# EAGLE board CT_schematic (EAGLE 7.6.0)

Size 100 x 80 mm. Coordinates in mm from the lower left corner, seen from the top.
Outline: 0,0 100,0 100,80 0,80 0,0
Copper layers (1*16): Top 0.035mm / dielectric 1.5mm / Bottom 0.035mm
Design rules "default": minimum track width 10mil, minimum drill 24mil, track to track 8mil, track to pad 8mil, pad to pad 8mil, via to via 8mil, smd to smd 8mil, copper to edge 40mil, drill to drill 8mil, minimum pad ring 10mil, minimum via ring 8mil, stop-mask expansion 4mil, vias tented up to drill 0mil, thermal gap 10mil

## Footprints (pad centres in the part's own frame; a part is rotated, then mirrored left to right if it is on the bottom)
C0603 = smd 0.8 x 0.8: 1 -0.762,0; 2 0.762,0
C0402 = smd 0.5 x 0.5: 1 -0.508,0; 2 0.508,0
C0805 = smd 1.2 x 1.3: 1 -1.016,0; 2 1.016,0
C1210 = smd 1.2 x 2.5: 1 -1.524,0; 2 1.524,0
R0603 = smd 0.8 x 0.8: 1 -0.762,0; 2 0.762,0
EXV-9H = smd 3.505 x 1.676: 1 -2.857,0; 2 2.857,0
L0603 = smd 0.8 x 0.8: 1 -0.762,0; 2 0.762,0
L1210 = smd 1.2 x 2.5: 1 -1.524,0; 2 1.524,0
PJ-037B_PACKAGE = drill 3.7 square: 1 12,0 | drill 3.2 square: 2 6,0
TFBGA216 = smd 0.4 x 0.4: A1 -5.6,5.6; A2 -4.8,5.6; A3 -4,5.6; A4 -3.2,5.6; A5 -2.4,5.6; A6 -1.6,5.6; A7 -0.8,5.6; A8 0,5.6; A9 0.8,5.6; A10 1.6,5.6; A11 2.4,5.6; A12 3.2,5.6; A13 4,5.6; A14 4.8,5.6; A15 5.6,5.6; B1 -5.6,4.8; B2 -4.8,4.8; B3 -4,4.8; B4 -3.2,4.8; B5 -2.4,4.8; B6 -1.6,4.8; B7 -0.8,4.8; B8 0,4.8; B9 0.8,4.8; B10 1.6,4.8; B11 2.4,4.8; B12 3.2,4.8; B13 4,4.8; B14 4.8,4.8; B15 5.6,4.8; C1 -5.6,4; C2 -4.8,4; C3 -4,4; C4 -3.2,4; C5 -2.4,4; C6 -1.6,4; C7 -0.8,4; C8 0,4; C9 0.8,4; C10 1.6,4; C11 2.4,4; C12 3.2,4; C13 4,4; C14 4.8,4; C15 5.6,4; D1 -5.6,3.2; D2 -4.8,3.2; D3 -4,3.2; D4 -3.2,3.2; D5 -2.4,3.2; D6 -1.6,3.2; D7 -0.8,3.2; D8 0,3.2; D9 0.8,3.2; D10 1.6,3.2; D11 2.4,3.2; D12 3.2,3.2; D13 4,3.2; D14 4.8,3.2; D15 5.6,3.2; E1 -5.6,2.4; E2 -4.8,2.4; E3 -4,2.4; E4 -3.2,2.4; E5 -2.4,2.4; E6 -1.6,2.4; E7 -0.8,2.4; E8 0,2.4; E9 0.8,2.4; E10 1.6,2.4; E11 2.4,2.4; E12 3.2,2.4; E13 4,2.4; E14 4.8,2.4; E15 5.6,2.4; F1 -5.6,1.6; F2 -4.8,1.6; F3 -4,1.6; F4 -3.2,1.6; F5 -2.4,1.6; F6 -1.6,1.6; F7 -0.8,1.6; F8 0,1.6; F9 0.8,1.6; F10 1.6,1.6; F11 2.4,1.6; F12 3.2,1.6; F13 4,1.6; F14 4.8,1.6; F15 5.6,1.6; G1 -5.6,0.8; G2 -4.8,0.8; G3 -4,0.8; G4 -3.2,0.8; G5 -2.4,0.8; G6 -1.6,0.8; G10 1.6,0.8; G11 2.4,0.8; G12 3.2,0.8; G13 4,0.8; G14 4.8,0.8; G15 5.6,0.8; H1 -5.6,0; H2 -4.8,0; H3 -4,0; H4 -3.2,0; H5 -2.4,0; H6 -1.6,0; H10 1.6,0; H11 2.4,0; H12 3.2,0; H13 4,0; H14 4.8,0; H15 5.6,0; J1 -5.6,-0.8; J2 -4.8,-0.8; J3 -4,-0.8; J4 -3.2,-0.8; J5 -2.4,-0.8; J6 -1.6,-0.8; J10 1.6,-0.8; J11 2.4,-0.8; J12 3.2,-0.8; J13 4,-0.8; J14 4.8,-0.8; J15 5.6,-0.8; K1 -5.6,-1.6; K2 -4.8,-1.6; K3 -4,-1.6; K4 -3.2,-1.6; K5 -2.4,-1.6; K6 -1.6,-1.6; K7 -0.8,-1.6; K8 0,-1.6; K9 0.8,-1.6; K10 1.6,-1.6; K11 2.4,-1.6; K12 3.2,-1.6; K13 4,-1.6; K14 4.8,-1.6; K15 5.6,-1.6; L1 -5.6,-2.4; L2 -4.8,-2.4; L3 -4,-2.4; L4 -3.2,-2.4; L5 -2.4,-2.4; L6 -1.6,-2.4; L7 -0.8,-2.4; L8 0,-2.4; L9 0.8,-2.4; L10 1.6,-2.4; L11 2.4,-2.4; L12 3.2,-2.4; L13 4,-2.4; L14 4.8,-2.4; L15 5.6,-2.4; M1 -5.6,-3.2; M2 -4.8,-3.2; M3 -4,-3.2; M4 -3.2,-3.2; M5 -2.4,-3.2; M6 -1.6,-3.2; M7 -0.8,-3.2; M8 0,-3.2; M9 0.8,-3.2; M10 1.6,-3.2; M11 2.4,-3.2; M12 3.2,-3.2; M13 4,-3.2; M14 4.8,-3.2; M15 5.6,-3.2; N1 -5.6,-4; N2 -4.8,-4; N3 -4,-4; N4 -3.2,-4; N5 -2.4,-4; N6 -1.6,-4; N7 -0.8,-4; N8 0,-4; N9 0.8,-4; N10 1.6,-4; N11 2.4,-4; N12 3.2,-4; N13 4,-4; N14 4.8,-4; N15 5.6,-4; P1 -5.6,-4.8; P2 -4.8,-4.8; P3 -4,-4.8; P4 -3.2,-4.8; P5 -2.4,-4.8; P6 -1.6,-4.8; P7 -0.8,-4.8; P8 0,-4.8; P9 0.8,-4.8; P10 1.6,-4.8; P11 2.4,-4.8; P12 3.2,-4.8; P13 4,-4.8; P14 4.8,-4.8; P15 5.6,-4.8; R1 -5.6,-5.6; R2 -4.8,-5.6; R3 -4,-5.6; R4 -3.2,-5.6; R5 -2.4,-5.6; R6 -1.6,-5.6; R7 -0.8,-5.6; R8 0,-5.6; R9 0.8,-5.6; R10 1.6,-5.6; R11 2.4,-5.6; R12 3.2,-5.6; R13 4,-5.6; R14 4.8,-5.6; R15 5.6,-5.6
SOT-23-6 = smd 1.1 x 0.6: 1 -1.4,0.95; 2 -1.4,0; 3 -1.4,-0.95; 4 1.4,-0.95; 5 1.4,0; 6 1.4,0.95
A2500R24A00GM = smd 1.5 x 0.61: 1 -3,7; 2 -3,6; 3 -3,5; 4 -3,4; 5 -3,3; 6 -3,2; 7 -3,1; 8 -3,0; 17 5.22,0; 18 5.22,1; 19 5.22,2; 20 5.22,3; 21 5.22,4; 22 5.22,5; 23 5.22,6; 24 5.22,7 | smd 0.61 x 1.5: 9 -2.39,-1.6; 10 -1.39,-1.6; 11 -0.39,-1.6; 12 0.61,-1.6; 13 1.61,-1.6; 14 2.61,-1.6; 15 3.61,-1.6; 16 4.61,-1.6 | smd 1 x 1: 25 -2.8,9; 26 -2.8,13; 27 5.02,9; 28 5.02,13; 29 0.11,5.75; 30 2.11,5.75
SAMTEC_FTSH-105-01-L-DV-K = smd 0.762 x 2.794: 1 -2.54,-2.032; 2 -2.54,2.032; 3 -1.27,-2.032; 4 -1.27,2.032; 5 0,-2.032; 6 0,2.032; 7 1.27,-2.032; 8 1.27,2.032; 9 2.54,-2.032; 10 2.54,2.032
LH430WV2-SD01 = smd 0.23 x 0.7: 1 0,0; 2 -0.4,0; 3 -0.8,0; 4 -1.2,0; 5 -1.6,0; 6 -2,0; 7 -2.4,0; 8 -2.8,0; 9 -3.2,0; 10 -3.6,0; 11 -4,0; 12 -4.4,0; 13 -4.8,0; 14 -5.2,0; 15 -5.6,0; 16 -5.6,-2.15; 17 -5.2,-2.15; 18 -4.8,-2.15; 19 -4.4,-2.15; 20 -4,-2.15; 21 -3.6,-2.15; 22 -3.2,-2.15; 23 -2.8,-2.15; 24 -2.4,-2.15; 25 -2,-2.15; 26 -1.6,-2.15; 27 -1.2,-2.15; 28 -0.8,-2.15; 29 -0.4,-2.15; 30 0,-2.15
SOIC-8 = smd 1.6 x 0.6: 1 -2.7,1.905 | smd 1.55 x 0.6: 2 -2.7,0.635; 3 -2.7,-0.635; 4 -2.7,-1.905; 5 2.7,-1.905; 6 2.7,-0.635; 7 2.7,0.635; 8 2.7,1.905
182-009-MALE = drill 1.194 pad 1.524 octagon: 1 -5.537,10.923; 2 -2.769,10.923; 3 0,10.923; 4 2.769,10.923; 5 5.537,10.923; 6 -4.153,8.08; 7 -1.384,8.08; 8 1.384,8.08; 9 4.153,8.08 | hole 3.048: -12.446,9.501; 12.446,9.501
RHB32_3P45X3P45 = smd 0.85 x 0.28: 1 -2.475,1.75; 2 -2.475,1.25; 3 -2.475,0.75; 4 -2.475,0.25; 5 -2.475,-0.25; 6 -2.475,-0.75; 7 -2.475,-1.25; 8 -2.475,-1.75; 17 2.475,-1.75; 18 2.475,-1.25; 19 2.475,-0.75; 20 2.475,-0.25; 21 2.475,0.25; 22 2.475,0.75; 23 2.475,1.25; 24 2.475,1.75 | smd 0.28 x 0.85: 9 -1.75,-2.475; 10 -1.25,-2.475; 11 -0.75,-2.475; 12 -0.25,-2.475; 13 0.25,-2.475; 14 0.75,-2.475; 15 1.25,-2.475; 16 1.75,-2.475; 25 1.75,2.475; 26 1.25,2.475; 27 0.75,2.475; 28 0.25,2.475; 29 -0.25,2.475; 30 -0.75,2.475; 31 -1.25,2.475; 32 -1.75,2.475 | smd 3.45 x 3.45: 33 0,0
FCI_10118193-0001LF = smd 0.4 x 1.35: 1 -1.3,2.675; 2 -0.65,2.675; 3 0,2.675; 4 0.65,2.675; 5 1.3,2.675 | smd 1.6 x 1.4: 6 -3.2,2.45; 7 3.2,2.45 | smd 1.9 x 1.9: 8 -1.2,0; 9 1.2,0 | hole 0.5: -3.3,0; 3.3,0
SOT143B = smd 1 x 0.7: 1 -0.75,-1 | smd 0.6 x 0.7: 2 0.95,-1; 3 0.95,1; 4 -0.95,1
MICRO_USB_AB = smd 0.4 x 1.35: 1 1.3,0.26; 2 0.65,0.26; 3 0,0.26; 4 -0.65,0.26; 5 -1.3,0.26 | drill 0.6 pad 0.95 long: 6 4.175,-2.54; 7 -4.175,-2.54 | drill 0.7 pad 1.1 long: 8 -2.225,0.46; 9 2.225,0.46
ABS07-32.768KHZ-7-T = smd 1.1 x 2.4: 1 -2.5,0; 2 0,0
ABLS-25.000MHZ-B2F-T = smd 5.6 x 2.8: 1 -3.81,0; 2 5.69,0
ASFL1 = smd 1.7 x 1.5: 1 -1.27,-1.1; 2 1.27,-1.1; 3 1.27,1.1; 4 -1.27,1.1
WSON-8 = smd 0.3 x 0.6: 1 -0.75,0; 2 0.05,0; 3 0.85,0; 4 1.65,0; 5 1.65,3.8; 6 0.85,3.8; 7 0.05,3.8; 8 -0.75,3.8 | smd 3 x 2.6: PAD 0.45,1.9
SOIC-8_EP = smd 1.6 x 0.533: 1 -2.921,1.905; 2 -2.921,0.635; 3 -2.921,-0.635; 4 -2.921,-1.905; 5 2.921,-1.905; 6 2.921,-0.635; 7 2.921,0.635; 8 2.921,1.905 | smd 2.54 x 3.302: EPAD 0,0 | drill 0.406 pad 0.406: P$1 -0.508,0.635; P$2 0.381,0.635; P$3 -0.508,-0.635; P$4 0.381,-0.635
DFN-8_DDB = smd 0.805 x 0.3: 1 -0.952,0.75; 2 -0.952,0.25; 3 -0.952,-0.25; 4 -0.952,-0.75; 5 0.952,-0.75; 6 0.952,-0.25; 7 0.952,0.25; 8 0.952,0.75 | smd 0.61 x 2.2: 9 0,0
QFN-38_UHF = smd 0.75 x 0.3: 1 -2.4,2.75; 2 -2.4,2.25; 3 -2.4,1.75; 4 -2.4,1.25; 6 -2.4,0.25; 7 -2.4,-0.25; 8 -2.4,-0.75; 9 -2.4,-1.25; 10 -2.4,-1.75; 11 -2.4,-2.25; 12 -2.4,-2.75; 20 2.4,-2.75; 21 2.4,-2.25; 22 2.4,-1.75; 23 2.4,-1.25; 24 2.4,-0.75; 25 2.4,-0.25; 26 2.4,0.25; 27 2.4,0.75; 28 2.4,1.25; 29 2.4,1.75; 30 2.4,2.25; 31 2.4,2.75 | smd 0.758 x 0.3: 5 -2.4,0.75 | smd 0.3 x 0.75: 13 -1.5,-3.4; 14 -1,-3.4; 15 -0.5,-3.4; 16 0,-3.4; 17 0.5,-3.4; 18 1,-3.4; 19 1.5,-3.4; 32 1.5,3.4; 33 1,3.4; 34 0.5,3.4; 35 0,3.4; 36 -0.5,3.4; 37 -1,3.4; 38 -1.5,3.4 | smd 3.2 x 5.2: 39 0,0
IRF8306MTRPBF = smd 0.9 x 1.85: 1 0,0; 2 0,-2.35; 6 6.4,0; 7 6.4,-2.35 | smd 0.75 x 0.75: 3 1.75,-1.175 | smd 1.45 x 0.87: 4 3.5,-0.565; 5 3.5,-1.785
DCU0008A_N = smd 0.5 x 0.3: 1 -1.6,0.75; 2 -1.6,0.25; 3 -1.6,-0.25; 4 -1.6,-0.75; 5 1.6,-0.75; 6 1.6,-0.25; 7 1.6,0.25; 8 1.6,0.75
SW_4-1437565-2 = smd 1.4 x 2.1: 1 -2.23,4.55; 2 -2.23,-4.55; 3 2.23,4.55; 4 2.23,-4.55
LGM67K-G1J2-24-Z = smd 0.8 x 1.4: A -2,0; C 0,0
NC7SZ125M5X = smd 1.3 x 0.7: 1 -1.3,0.95; 2 -1.3,0; 3 -1.3,-0.95; 4 1.3,-0.95; 5 1.3,0.95

## Placement (x,y rotation side)
C1  1e-06  [C0603]  -30.48,92.71 0 top  (outside the outline)
C2  1e-07  [C0603]  -34.29,92.71 0 top  (outside the outline)
C3  1e-07  [C0603]  -38.1,92.71 0 top  (outside the outline)
C4  1e-07  [C0603]  -41.91,92.71 0 top  (outside the outline)
C5  1e-07  [C0603]  -45.72,92.71 0 top  (outside the outline)
C6  1e-07  [C0603]  -49.53,92.71 0 top  (outside the outline)
C7  1e-07  [C0603]  -53.34,92.71 0 top  (outside the outline)
C8  1e-07  [C0603]  -57.15,92.71 0 top  (outside the outline)
C9  1e-07  [C0603]  -60.96,92.71 0 top  (outside the outline)
C10  1e-07  [C0603]  -64.77,92.71 0 top  (outside the outline)
C11  1e-07  [C0603]  -68.58,92.71 0 top  (outside the outline)
C12  1e-07  [C0603]  -72.39,92.71 0 top  (outside the outline)
C13  1e-07  [C0603]  -76.2,92.71 0 top  (outside the outline)
C14  1e-07  [C0603]  -80.01,92.71 0 top  (outside the outline)
C15  1e-07  [C0603]  -83.82,92.71 0 top  (outside the outline)
C16  1e-07  [C0603]  -87.63,92.71 0 top  (outside the outline)
C17  1e-07  [C0603]  -91.44,92.71 0 top  (outside the outline)
C18  1e-07  [C0603]  -95.25,92.71 0 top  (outside the outline)
C19  1e-07  [C0603]  -99.06,92.71 0 top  (outside the outline)
C20  1e-07  [C0603]  -102.87,92.71 0 top  (outside the outline)
C21  1e-07  [C0603]  -15.24,97.79 0 top  (outside the outline)
C22  4.7e-06  [C0603]  -95.25,87.63 0 top  (outside the outline)
C23  1e-08  [C0603]  -19.05,97.79 0 top  (outside the outline)
C24  1e-06  [C0603]  -22.86,97.79 0 top  (outside the outline)
C25  1e-07  [C0603]  -26.67,97.79 0 top  (outside the outline)
C26  2.2e-06  [C0603]  -99.06,87.63 0 top  (outside the outline)
C27  1e-07  [C0603]  -30.48,97.79 0 top  (outside the outline)
C28  1e-07  [C0603]  -34.29,97.79 0 top  (outside the outline)
C29  1e-11  [C0402]  -39.37,102.87 0 top  (outside the outline)
C30  1e-11  [C0402]  -43.18,102.87 0 top  (outside the outline)
C31  1e-11  [C0402]  -46.99,102.87 0 top  (outside the outline)
C32  1e-11  [C0402]  -50.8,102.87 0 top  (outside the outline)
C33  1e-05  [C0805]  -58.42,77.47 0 top  (outside the outline)
C34  1e-07  [C0402]  -54.61,102.87 0 top  (outside the outline)
C35  1e-07  [C0402]  -58.42,102.87 0 top  (outside the outline)
C36  1e-07  [C0402]  -62.23,102.87 0 top  (outside the outline)
C37  1e-07  [C0402]  -66.04,102.87 0 top  (outside the outline)
C38  1e-07  [C0402]  -69.85,102.87 0 top  (outside the outline)
C39  1e-07  [C0402]  -73.66,102.87 0 top  (outside the outline)
C40  1e-07  [C0402]  -77.47,102.87 0 top  (outside the outline)
C41  1e-07  [C0402]  -81.28,102.87 0 top  (outside the outline)
C42  2.2e-06  [C0603]  -102.87,87.63 0 top  (outside the outline)
C43  1e-07  [C0402]  -85.09,102.87 0 top  (outside the outline)
C44  1e-07  [C0402]  -88.9,102.87 0 top  (outside the outline)
C45  2.2e-06  [C0603]  -15.24,92.71 0 top  (outside the outline)
C46  1e-06  [C0603]  -38.1,97.79 0 top  (outside the outline)
C47  1e-08  [C0402]  -92.71,102.87 0 top  (outside the outline)
C48  1e-08  [C0402]  -96.52,102.87 0 top  (outside the outline)
C49  1e-05  [C1210]  -29.21,71.12 0 top  (outside the outline)
C50  1e-05  [C0805]  -63.5,77.47 0 top  (outside the outline)
C51  1e-05  [C1210]  -35.56,71.12 0 top  (outside the outline)
C52  1e-05  [C1210]  -41.91,71.12 0 top  (outside the outline)
C53  1e-05  [C1210]  -48.26,71.12 0 top  (outside the outline)
C54  1e-05  [C1210]  -54.61,71.12 0 top  (outside the outline)
C55  1e-08  [C0402]  -100.33,102.87 0 top  (outside the outline)
C56  1e-05  [C1210]  -60.96,71.12 0 top  (outside the outline)
C57  1e-05  [C0805]  -68.58,77.47 0 top  (outside the outline)
C58  1e-08  [C0402]  -104.14,102.87 0 top  (outside the outline)
C59  1e-05  [C1210]  -67.31,71.12 0 top  (outside the outline)
C60  1e-05  [C1210]  -73.66,71.12 0 top  (outside the outline)
C61  8e-07  [R0603]  -41.91,97.79 0 top  (outside the outline)
C62  1e-05  [C1210]  -80.01,71.12 0 top  (outside the outline)
C63  1e-08  [C0402]  -15.24,107.95 0 top  (outside the outline)
C64  1e-05  [C1210]  -86.36,71.12 0 top  (outside the outline)
C65  1e-05  [C1210]  -92.71,71.12 0 top  (outside the outline)
C66  1e-05  [C1210]  -99.06,71.12 0 top  (outside the outline)
C67  2.2e-06  [C0603]  -19.05,92.71 0 top  (outside the outline)
C68  2.2e-07  [C0603]  -22.86,92.71 0 top  (outside the outline)
C69  1e-08  [C0402]  -19.05,107.95 0 top  (outside the outline)
C70  1e-05  [C1210]  -16.51,77.47 0 top  (outside the outline)
C71  1e-05  [C0805]  -73.66,77.47 0 top  (outside the outline)
C72  1e-07  [C0402]  -22.86,107.95 0 top  (outside the outline)
C73  2.2e-06  [C0603]  -26.67,92.71 0 top  (outside the outline)
C74  2.45e-08  [R0603]  -72.39,82.55 0 top  (outside the outline)
C75  2.8258362168397e-09  [R0603]  -83.82,77.47 0 top  (outside the outline)
C76  7.105e-09  [R0603]  -16.51,82.55 0 top  (outside the outline)
C77  0.0001  [EXV-9H]  -26.67,63.5 0 top  (outside the outline)
C78  0.0001  [EXV-9H]  -38.1,63.5 0 top  (outside the outline)
C79  1e-08  [C0402]  -26.67,107.95 0 top  (outside the outline)
C80  1e-07  [C0402]  -30.48,107.95 0 top  (outside the outline)
C81  1e-08  [C0402]  -34.29,107.95 0 top  (outside the outline)
C82  1e-07  [C0402]  -38.1,107.95 0 top  (outside the outline)
C83  1e-08  [C0402]  -41.91,107.95 0 top  (outside the outline)
C84  1e-08  [C0402]  -45.72,107.95 0 top  (outside the outline)
C85  1e-08  [C0402]  -49.53,107.95 0 top  (outside the outline)
C86  1e-08  [C0402]  -53.34,107.95 0 top  (outside the outline)
F1  240.0  [L0603]  -45.72,97.79 0 top  (outside the outline)
I1  1e-05  [L1210]  -22.86,77.47 0 top  (outside the outline)
J1  PJ-037B  [PJ-037B_PACKAGE]  -57.15,33.02 0 top  (outside the outline)
R2  1000.0  [R0603]  -49.53,97.79 0 top  (outside the outline)
R7  4700.0  [R0603]  -53.34,97.79 0 top  (outside the outline)
R8  4700.0  [R0603]  -57.15,97.79 0 top  (outside the outline)
R9  4700.0  [R0603]  -60.96,97.79 0 top  (outside the outline)
R10  2200.0  [R0603]  -64.77,97.79 0 top  (outside the outline)
R11  47000.0  [R0603]  -77.47,82.55 0 top  (outside the outline)
R12  10000.0  [R0603]  -82.55,82.55 0 top  (outside the outline)
R13  10000.0  [R0603]  -87.63,82.55 0 top  (outside the outline)
R14  10000.0  [R0603]  -92.71,82.55 0 top  (outside the outline)
R15  10000.0  [R0603]  -97.79,82.55 0 top  (outside the outline)
R16  10000.0  [R0603]  -102.87,82.55 0 top  (outside the outline)
R17  10000.0  [R0603]  -15.24,87.63 0 top  (outside the outline)
R18  10000.0  [R0603]  -20.32,87.63 0 top  (outside the outline)
R19  10000.0  [R0603]  -25.4,87.63 0 top  (outside the outline)
R20  10000.0  [R0603]  -30.48,87.63 0 top  (outside the outline)
R21  5.0  [R0603]  -68.58,97.79 0 top  (outside the outline)
R22  10000.0  [R0603]  -35.56,87.63 0 top  (outside the outline)
R23  120.0  [R0603]  -72.39,97.79 0 top  (outside the outline)
R24  100000.0  [R0603]  -21.59,82.55 0 top  (outside the outline)
R25  10000.0  [R0603]  -40.64,87.63 0 top  (outside the outline)
R26  10000.0  [R0603]  -45.72,87.63 0 top  (outside the outline)
R27  100000.0  [R0603]  -26.67,82.55 0 top  (outside the outline)
R28  200.0  [R0603]  -76.2,97.79 0 top  (outside the outline)
R29  1000.0  [R0603]  -80.01,97.79 0 top  (outside the outline)
R30  910.0  [R0603]  -83.82,97.79 0 top  (outside the outline)
R31  2200.0  [R0603]  -87.63,97.79 0 top  (outside the outline)
R32  100000.0  [R0603]  -31.75,82.55 0 top  (outside the outline)
R33  806.0  [R0603]  -91.44,97.79 0 top  (outside the outline)
R34  1000.0  [R0603]  -95.25,97.79 0 top  (outside the outline)
R35  100000.0  [R0603]  -36.83,82.55 0 top  (outside the outline)
R36  1800.0  [R0603]  -99.06,97.79 0 top  (outside the outline)
R37  1000.0  [R0603]  -102.87,97.79 0 top  (outside the outline)
R38  100000.0  [R0603]  -41.91,82.55 0 top  (outside the outline)
R39  153694.38  [R0603]  -96.52,77.47 0 top  (outside the outline)
R40  100000.0  [R0603]  -46.99,82.55 0 top  (outside the outline)
R41  100000.0  [R0603]  -52.07,82.55 0 top  (outside the outline)
R42  3900.0  [R0603]  -15.24,102.87 0 top  (outside the outline)
R43  1000.0  [R0603]  -19.05,102.87 0 top  (outside the outline)
R44  100000.0  [R0603]  -57.15,82.55 0 top  (outside the outline)
R45  1600000.0  [R0603]  -101.6,77.47 0 top  (outside the outline)
R46  100000.0  [R0603]  -62.23,82.55 0 top  (outside the outline)
R47  200.0  [R0603]  -22.86,102.87 0 top  (outside the outline)
R48  1000.0  [R0603]  -26.67,102.87 0 top  (outside the outline)
R49  10000.0  [R0603]  -50.8,87.63 0 top  (outside the outline)
R50  75000.0  [R0603]  -55.88,87.63 0 top  (outside the outline)
R51  10000.0  [R0603]  -60.96,87.63 0 top  (outside the outline)
R52  10000.0  [R0603]  -66.04,87.63 0 top  (outside the outline)
R53  95300.0  [R0603]  -71.12,87.63 0 top  (outside the outline)
R54  95300.0  [R0603]  -76.2,87.63 0 top  (outside the outline)
R55  10000.0  [R0603]  -81.28,87.63 0 top  (outside the outline)
R56  10000.0  [R0603]  -86.36,87.63 0 top  (outside the outline)
R57  10000.0  [R0603]  -91.44,87.63 0 top  (outside the outline)
R58  102454.54545455  [R0603]  -91.44,77.47 0 top  (outside the outline)
R59  200000.0  [R0603]  -67.31,82.55 0 top  (outside the outline)
U1  STM32F469NGH6  [TFBGA216]  -85.09,8.89 0 top  (outside the outline)
U2  MAX4995AAUT+T  [SOT-23-6]  -27.94,76.2 0 top  (outside the outline)
U3  A2500R24A00GM  [A2500R24A00GM]  -27.94,7.62 0 top  (outside the outline)
U4  FTSH-105-01-L-DV-K  [SAMTEC_FTSH-105-01-L-DV-K]  -35.56,33.02 0 top  (outside the outline)
U5  LH430WV2-SD01  [LH430WV2-SD01]  -30.48,104.14 0 top  (outside the outline)
U6  SN65HVD230D  [SOIC-8]  -100.33,30.48 0 top  (outside the outline)
U7  182-009-113R531  [182-009-MALE]  -57.15,6.35 0 top  (outside the outline)
U8  TUSB1210BRHBR  [RHB32_3P45X3P45]  -68.58,63.5 0 top  (outside the outline)
U9  10118193-0001LF  [FCI_10118193-0001LF]  -93.98,53.34 0 top  (outside the outline)
U10  prtr5v0u2ax  [SOT143B]  -72.39,107.95 0 top  (outside the outline)
U11  47590-0001  [MICRO_USB_AB]  -66.04,33.02 0 top  (outside the outline)
U12  prtr5v0u2ax  [SOT143B]  -85.09,107.95 0 top  (outside the outline)
U13  ABS07-32.768KHZ-7-T  [ABS07-32.768KHZ-7-T]  -88.9,63.5 0 top  (outside the outline)
U14  ABLS-25.000MHZ-B2F-T  [ABLS-25.000MHZ-B2F-T]  -57.15,63.5 0 top  (outside the outline)
U15  ASFL1-26MHZ-NCS  [ASFL1]  -85.09,54.61 0 top  (outside the outline)
U16  LP3878SDX-ADJ/NOPB  [WSON-8]  -60.96,43.18 0 top  (outside the outline)
U17  MIC5234YME  [SOIC-8_EP]  -97.79,62.23 0 top  (outside the outline)
U18  LP3878SDX-ADJ/NOPB  [WSON-8]  -81.28,43.18 0 top  (outside the outline)
U19  LP3878SDX-ADJ/NOPB  [WSON-8]  -101.6,43.18 0 top  (outside the outline)
U20  LP2951ACSDX/NOPB  [WSON-8]  -68.58,52.07 0 top  (outside the outline)
U21  LP3878SDX-ADJ/NOPB  [WSON-8]  -30.48,52.07 0 top  (outside the outline)
U22  LT3494AEDDB#TRMPBF  [DFN-8_DDB]  -57.15,107.95 0 top  (outside the outline)
U23  LP3878SDX-ADJ/NOPB  [WSON-8]  -50.8,52.07 0 top  (outside the outline)
U24  LTC2928CUHF#PBF  [QFN-38_UHF]  -16.51,63.5 0 top  (outside the outline)
U25  IRF8306MTRPbF  [IRF8306MTRPBF]  -26.67,45.72 0 top  (outside the outline)
U26  IRF8306MTRPbF  [IRF8306MTRPBF]  -41.91,45.72 0 top  (outside the outline)
U27  LSF0102DCTR  [DCU0008A_N]  -97.79,107.95 0 top  (outside the outline)
U28  4-1437565-2  [SW_4-1437565-2]  -86.36,31.75 0 top  (outside the outline)
U29  Q65110A2395  [LGM67K-G1J2-24-Z]  -17.78,71.12 0 top  (outside the outline)
U30  nc7sz125m5x  [NC7SZ125M5X]  -33.02,76.2 0 top  (outside the outline)
U31  nc7sz125m5x  [NC7SZ125M5X]  -39.37,76.2 0 top  (outside the outline)
U32  nc7sz125m5x  [NC7SZ125M5X]  -45.72,76.2 0 top  (outside the outline)
U33  nc7sz125m5x  [NC7SZ125M5X]  -52.07,76.2 0 top  (outside the outline)

## Library data of the parts
C1-C86 F1 I1 J1 R2 R7-R59 U1-U33 = circuit_tree

## Nets
CLK_CRYSTAL_U1_E1: C29.1 U1.E1 U13.1
CLK_CRYSTAL_U1_F1: C30.1 U1.F1 U13.2
CLK_CRYSTAL_U1_G1: C31.1 U1.G1 U14.1
CLK_CRYSTAL_U1_H1: C32.1 U1.H1 U14.2
CLK_U8_1: U8.1 U15.3
GND: C1.2 C2.2 C3.2 C4.2 C5.2 C6.2 C7.2 C8.2 C9.2 C10.2 C11.2 C12.2 C13.2 C14.2 C15.2 C16.2 C17.2 C18.2 C19.2 C20.2 C21.2 C22.2 C23.2 C24.2 C25.2 C26.2 C27.2 C28.2 C29.2 C30.2 C31.2 C32.2 C33.2 C34.2 C35.2 C36.2 C37.2 C38.2 C39.2 C40.2 C41.2 C42.2 C43.2 C44.2 C45.2 C46.2 C47.2 C48.2 C49.2 C50.2 C51.2 C52.2 C53.2 C54.2 C55.2 C56.2 C57.2 C58.2 C59.2 C60.2 C61.2 C62.2 C63.2 C64.2 C65.2 C66.2 C67.2 C68.2 C69.2 C70.2 C71.2 C72.2 C73.2 C74.2 C75.2 C76.2 C77.2 C78.2 C79.2 C80.2 C81.2 C82.2 C83.2 C84.2 C85.2 C86.2 J1.2 R2.2 R11.2 R14.2 R17.2 R21.2 R22.2 R24.2 R29.2 R31.2 R34.2 R37.2 R40.2 R43.2 R48.2 R50.2 R53.2 R54.2 R55.2 R56.2 R57.2 U1.F2 U1.F6 U1.F7 U1.F8 U1.F9 U1.F10 U1.G6 U1.G10 U1.G12 U1.H6 U1.H10 U1.J6 U1.J10 U1.K6 U1.K7 U1.K8 U1.K9 U1.K10 U1.L6 U1.M1 U1.N1 U2.2 U3.8 U3.17 U4.3 U4.5 U5.1 U5.6 U5.9 U5.12 U5.15 U5.17 U5.18 U5.19 U5.24 U5.27 U6.2 U7.5 U8.33 U9.5 U9.6 U9.7 U9.8 U9.9 U10.1 U11.5 U11.6 U11.7 U11.8 U11.9 U12.1 U15.2 U16.3 U16.PAD U17.7 U17.EPAD U18.3 U18.PAD U19.3 U19.PAD U20.3 U20.4 U20.PAD U21.3 U21.PAD U22.2 U22.9 U23.3 U23.PAD U24.8 U24.9 U24.10 U24.12 U24.13 U24.24 U24.25 U24.30 U24.32 U24.39 U27.1 U29.C U30.2 U30.3 U31.1 U31.3 U32.1 U32.3 U33.1 U33.3
NET_U1_E5: R12.1 U1.E5
NET_U1_E6: R13.1 U1.E6
NET_U1_E11: C28.1 U1.E11
NET_U1_G13: C26.1 U1.G13 U1.K12
NET_U1_J1: R8.1 U1.J1 U32.4
NET_U1_L5: R15.1 U1.L5
NET_U1_M5: R14.1 U1.M5
NET_U1_R1: C23.1 C24.1 F1.1 U1.P1 U1.R1
NET_U1_R14: U29.A
NET_U1_R15: U28.3 U28.4
NET_U2_3: R11.1 U2.3
NET_U4_9: R21.1 U4.9
NET_U5_4: R7.1 U5.4 U31.4
NET_U5_5: R10.1
NET_U5_20: R22.1 U5.20
NET_U6_6: R23.2 U6.6
NET_U6_8: R24.1 U6.8
NET_U7_2: R23.2 U6.6 U7.2
NET_U7_3: R23.1 U6.7 U7.3
NET_U8_11: R25.1 U8.11
NET_U8_12: C45.1 U8.12
NET_U8_14: R26.1 U8.14
NET_U8_20: C42.1 U8.20
NET_U8_27: R9.1 U8.27 U33.4
NET_U9_1: C46.1 U8.22 U9.1 U10.4
NET_U9_2: U8.19 U9.2 U10.3
NET_U9_3: U8.18 U9.3 U10.2
NET_U16_1: C48.1 U16.1
NET_U16_6: R28.2 R29.1 U16.6
NET_U16_8: R27.1 U16.8
NET_U17_4: R30.2 R31.1 U17.4
NET_U18_1: C55.1 U18.1
NET_U18_6: R33.2 R34.1 U18.6
NET_U18_8: R32.1 U18.8
NET_U19_1: C58.1 U19.1
NET_U19_6: R36.2 R37.1 U19.6
NET_U19_8: R35.1 U19.8
NET_U20_5: R38.1 U20.5
NET_U20_7: R39.2 R40.1 U20.7
NET_U21_1: C63.1 U21.1
NET_U21_6: R42.2 R43.1 U21.6
NET_U21_8: R41.1 U21.8
NET_U22_1: I1.1 U22.1
NET_U22_5: R44.1 U22.5
NET_U22_6: R45.1 U22.6
NET_U22_8: C68.1 U22.8
NET_U23_1: C69.1 U23.1
NET_U23_6: R47.2 R48.1 U23.6
NET_U23_8: R46.1 U23.8
NET_U24_3: R56.1 U24.3
NET_U24_6: R53.1 U24.6
NET_U24_7: R54.1 U24.7
NET_U24_16: R55.1 R58.1 U24.16
NET_U24_18: R52.1 U24.18
NET_U24_19: R51.1 U24.19 U24.20
NET_U24_21: R49.1 R50.1 U24.21 U30.4 U31.2 U32.2 U33.2
NET_U24_22: C72.1 R49.2 R51.2 R52.2 U24.11 U24.22
NET_U24_26: C75.1 U24.26
NET_U24_27: C74.1 U24.27
NET_U24_28: C76.1 U24.28
NET_U24_38: R57.1 U24.38
NET_U25_3: U24.2 U25.3
NET_U26_3: U24.37 U26.3
NET_U27_8: R59.1 U27.8
NET_U28_1: R2.1 U28.1 U28.2
PROC_CAN1_RX_TOIOBUF: U27.4
PROC_CAN1_RX_TOXCVR: U6.4 U27.5
PROC_CAN1_TX_TOIOBUF: U27.3
PROC_CAN1_TX_TOXCVR: U6.1 U27.6
PROC_DSIHOST_CKN: U1.H13 U5.13
PROC_DSIHOST_CKP: U1.H12 U5.14
PROC_DSIHOST_D0N: U1.J13 U5.7
PROC_DSIHOST_D0P: U1.J12 U5.8
PROC_DSIHOST_D1N: U1.F13 U5.10
PROC_DSIHOST_D1P: U1.F12 U5.11
PROC_GPIO_TO_U1_USB_FAULT: R16.1 U1.A2 U2.6
PROC_GPIO_TO_U1_VBUS_EN: R17.1 U1.A1 U2.4
PROC_SPI2_MISO: U1.C14 U3.10
PROC_SPI2_MOSI: U1.C13 U3.11
PROC_SPI2_NSS: U1.E14 U3.12
PROC_SPI2_SCK: U1.C11 U3.9
PROC_SYS_JTCK_SWCLK: R19.1 U1.A14 U4.4
PROC_SYS_JTDO_SWO: U1.A10 U4.6
PROC_SYS_JTMS_SWDIO: R20.1 U1.A15 U4.2
PROC_USB_OTG_FS_DM: U1.C15 U11.2 U12.3
PROC_USB_OTG_FS_DP: U1.B15 U11.3 U12.2
PROC_USB_OTG_FS_ID: U1.D15 U11.4
PROC_USB_OTG_FS_VBUS: U1.E15 U2.1 U11.1 U12.4
PROC_USB_OTG_HS_ULPI_CK: U1.P4 U8.26
PROC_USB_OTG_HS_ULPI_D0: U1.R2 U8.3
PROC_USB_OTG_HS_ULPI_D1: U1.R5 U8.4
PROC_USB_OTG_HS_ULPI_D2: U1.R4 U8.5
PROC_USB_OTG_HS_ULPI_D3: U1.P12 U8.6
PROC_USB_OTG_HS_ULPI_D4: U1.R13 U8.7
PROC_USB_OTG_HS_ULPI_D5: U1.L13 U8.9
PROC_USB_OTG_HS_ULPI_D6: U1.K14 U8.10
PROC_USB_OTG_HS_ULPI_D7: U1.A8 U8.13
PROC_USB_OTG_HS_ULPI_DIR: U1.F3 U8.31
PROC_USB_OTG_HS_ULPI_NXT: U1.H4 U8.2
PROC_USB_OTG_HS_ULPI_STP: U1.M2 U8.29
RST_OUT_U4_JTAG_RST_B: R18.1 U4.10 U30.1
VCC_12V6: C73.1 C77.1 C78.1 J1.1 R58.2 U24.23 U25.1 U25.2 U25.6 U25.7 U26.1 U26.2 U26.6 U26.7
VCC_S1_12V6: C49.1 C51.1 C52.1 C56.1 C59.1 C61.1 C64.1 C66.1 I1.2 R27.2 R32.2 R35.2 R41.2 R44.2 U16.4 U17.5 U17.8 U18.4 U19.4 U20.8 U21.4 U22.3 U22.4 U25.4 U25.5
VCC_S2_12V6: C70.1 R46.2 U23.4 U26.4 U26.5
VCC_TIER1_1V2: C27.1 C50.1 R28.1 U1.L11 U16.5
VCC_TIER1_1V5: C53.1 C54.1 R30.1 U5.29 U17.1
VCC_TIER1_1V8: C1.1 C2.1 C3.1 C4.1 C5.1 C6.1 C7.1 C8.1 C9.1 C10.1 C11.1 C12.1 C13.1 C14.1 C15.1 C16.1 C17.1 C18.1 C19.1 C20.1 C21.1 C22.1 C25.1 C33.1 C34.1 C35.1 C43.1 C44.1 C57.1 C81.1 C82.1 C83.1 C84.1 C85.1 C86.1 F1.2 R7.2 R8.2 R9.2 R10.2 R12.2 R13.2 R15.2 R16.2 R18.2 R19.2 R20.2 R25.2 R26.2 R33.1 U1.C1 U1.E7 U1.E8 U1.E9 U1.E10 U1.F4 U1.F5 U1.F11 U1.G5 U1.G11 U1.H5 U1.H11 U1.J5 U1.J11 U1.K5 U1.K11 U1.L7 U1.L8 U1.L9 U1.L10 U3.18 U4.1 U5.2 U8.28 U8.30 U8.32 U18.5 U27.2 U30.5 U31.5 U32.5 U33.5
VCC_TIER1_2V8: C37.1 C38.1 C39.1 C41.1 C60.1 R36.1 U5.16 U5.21 U5.22 U5.23 U8.21 U19.5
VCC_TIER1_3V3: C40.1 C47.1 C62.1 C79.1 C80.1 R38.2 R39.1 R59.2 U6.3 U15.4 U20.1 U27.7
VCC_TIER1_5V0: C65.1 R42.1 U2.5 U21.5
VCC_TIER1_12V0: C36.1 C67.1 R45.2 U5.30 U22.7
VCC_TIER2_1V2: C71.1 R47.1 U23.5

## Tracks (layer width: path | path; a pad name or v marks a point on that pad's centre or on a via)
CLK_CRYSTAL_U1_E1  (2 unrouted)
CLK_CRYSTAL_U1_F1  (2 unrouted)
CLK_CRYSTAL_U1_G1  (2 unrouted)
CLK_CRYSTAL_U1_H1  (2 unrouted)
CLK_U8_1  (1 unrouted)
GND  (195 unrouted)
NET_U1_E5  (1 unrouted)
NET_U1_E6  (1 unrouted)
NET_U1_E11  (1 unrouted)
NET_U1_G13  (2 unrouted)
NET_U1_J1  (2 unrouted)
NET_U1_L5  (1 unrouted)
NET_U1_M5  (1 unrouted)
NET_U1_R1  (4 unrouted)
NET_U1_R15  (1 unrouted)
NET_U2_3  (1 unrouted)
NET_U4_9  (1 unrouted)
NET_U5_4  (2 unrouted)
NET_U5_20  (1 unrouted)
NET_U6_6  (1 unrouted)
NET_U6_8  (1 unrouted)
NET_U7_2  (2 unrouted)
NET_U7_3  (2 unrouted)
NET_U8_11  (1 unrouted)
NET_U8_12  (1 unrouted)
NET_U8_14  (1 unrouted)
NET_U8_20  (1 unrouted)
NET_U8_27  (2 unrouted)
NET_U9_1  (3 unrouted)
NET_U9_2  (2 unrouted)
NET_U9_3  (2 unrouted)
NET_U16_1  (1 unrouted)
NET_U16_6  (2 unrouted)
NET_U16_8  (1 unrouted)
NET_U17_4  (2 unrouted)
NET_U18_1  (1 unrouted)
NET_U18_6  (2 unrouted)
NET_U18_8  (1 unrouted)
NET_U19_1  (1 unrouted)
NET_U19_6  (2 unrouted)
NET_U19_8  (1 unrouted)
NET_U20_5  (1 unrouted)
NET_U20_7  (2 unrouted)
NET_U21_1  (1 unrouted)
NET_U21_6  (2 unrouted)
NET_U21_8  (1 unrouted)
NET_U22_1  (1 unrouted)
NET_U22_5  (1 unrouted)
NET_U22_6  (1 unrouted)
NET_U22_8  (1 unrouted)
NET_U23_1  (1 unrouted)
NET_U23_6  (2 unrouted)
NET_U23_8  (1 unrouted)
NET_U24_3  (1 unrouted)
NET_U24_6  (1 unrouted)
NET_U24_7  (1 unrouted)
NET_U24_16  (2 unrouted)
NET_U24_18  (1 unrouted)
NET_U24_19  (2 unrouted)
NET_U24_21  (6 unrouted)
NET_U24_22  (5 unrouted)
NET_U24_26  (1 unrouted)
NET_U24_27  (1 unrouted)
NET_U24_28  (1 unrouted)
NET_U24_38  (1 unrouted)
NET_U25_3  (1 unrouted)
NET_U26_3  (1 unrouted)
NET_U27_8  (1 unrouted)
NET_U28_1  (2 unrouted)
PROC_CAN1_RX_TOXCVR  (1 unrouted)
PROC_CAN1_TX_TOXCVR  (1 unrouted)
PROC_DSIHOST_CKN  (1 unrouted)
PROC_DSIHOST_CKP  (1 unrouted)
PROC_DSIHOST_D0N  (1 unrouted)
PROC_DSIHOST_D0P  (1 unrouted)
PROC_DSIHOST_D1N  (1 unrouted)
PROC_DSIHOST_D1P  (1 unrouted)
PROC_GPIO_TO_U1_USB_FAULT  (2 unrouted)
PROC_GPIO_TO_U1_VBUS_EN  (2 unrouted)
PROC_SPI2_MISO  (1 unrouted)
PROC_SPI2_MOSI  (1 unrouted)
PROC_SPI2_NSS  (1 unrouted)
PROC_SPI2_SCK  (1 unrouted)
PROC_SYS_JTCK_SWCLK  (2 unrouted)
PROC_SYS_JTDO_SWO  (1 unrouted)
PROC_SYS_JTMS_SWDIO  (2 unrouted)
PROC_USB_OTG_FS_DM  (2 unrouted)
PROC_USB_OTG_FS_DP  (2 unrouted)
PROC_USB_OTG_FS_ID  (1 unrouted)
PROC_USB_OTG_FS_VBUS  (3 unrouted)
PROC_USB_OTG_HS_ULPI_CK  (1 unrouted)
PROC_USB_OTG_HS_ULPI_D0  (1 unrouted)
PROC_USB_OTG_HS_ULPI_D1  (1 unrouted)
PROC_USB_OTG_HS_ULPI_D2  (1 unrouted)
PROC_USB_OTG_HS_ULPI_D3  (1 unrouted)
PROC_USB_OTG_HS_ULPI_D4  (1 unrouted)
PROC_USB_OTG_HS_ULPI_D5  (1 unrouted)
PROC_USB_OTG_HS_ULPI_D6  (1 unrouted)
PROC_USB_OTG_HS_ULPI_D7  (1 unrouted)
PROC_USB_OTG_HS_ULPI_DIR  (1 unrouted)
PROC_USB_OTG_HS_ULPI_NXT  (1 unrouted)
PROC_USB_OTG_HS_ULPI_STP  (1 unrouted)
RST_OUT_U4_JTAG_RST_B  (2 unrouted)
VCC_12V6  (13 unrouted)
VCC_S1_12V6  (24 unrouted)
VCC_S2_12V6  (4 unrouted)
VCC_TIER1_1V2  (4 unrouted)
VCC_TIER1_1V5  (4 unrouted)
VCC_TIER1_1V8  (81 unrouted)
VCC_TIER1_2V8  (11 unrouted)
VCC_TIER1_3V3  (11 unrouted)
VCC_TIER1_5V0  (3 unrouted)
VCC_TIER1_12V0  (4 unrouted)
VCC_TIER2_1V2  (2 unrouted)